# Altium PCB pci_104.PcbDoc (part 3 of 4)
Units mil, origin at the board's own origin, x right, y up, seen from the top; angles counter-clockwise.
Board outline 3775.2 x 3550 mil, 4 copper layers (Top Layer - RF, MidLayer2 - GND, MidLayer3 - POWER, Bottom Layer - Digital), stack 61.756 mil thick; 251 components, 242 nets, 872 pads, 382 vias.
Unrouted connection lines stored in the file: 291.
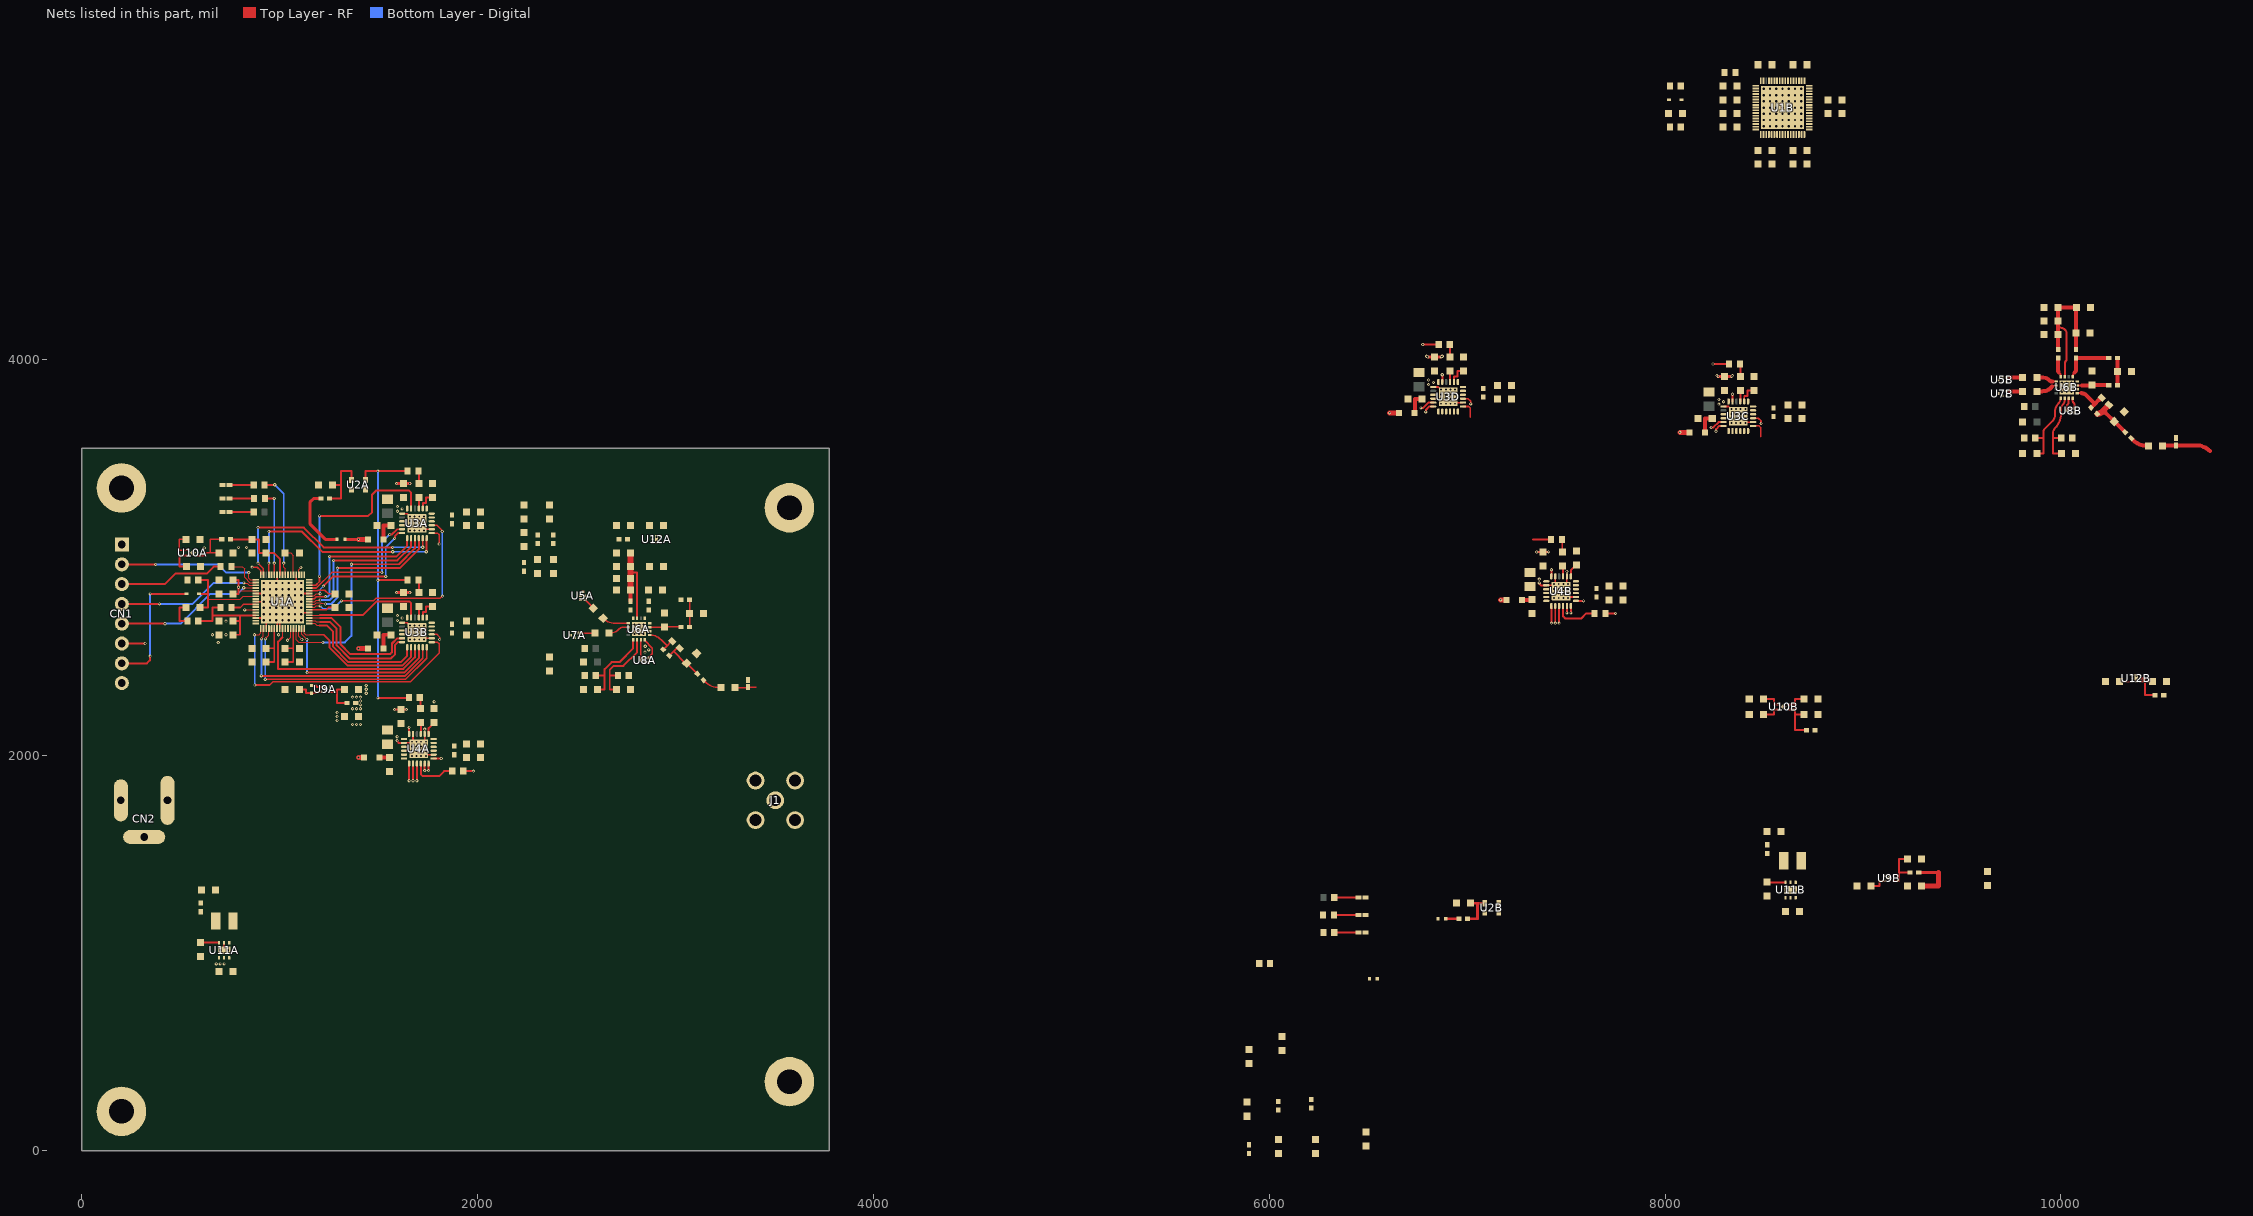
[diagram p4: the nets of this part, all layers, seen from the top]

## Via types
v1: diameter 15.75, hole 7.87, Top Layer - RF to Bottom Layer - Digital, tented both sides, 154 vias
v2: diameter 19.68, hole 9.84, Top Layer - RF to Bottom Layer - Digital, tented top, 114 vias
v3: diameter 23.62, hole 11.81, Top Layer - RF to Bottom Layer - Digital, tented top, 102 vias
v4: diameter 15.75, hole 7.87, Top Layer - RF to Bottom Layer - Digital, 8 vias
v5: diameter 15.75, hole 7.87, Top Layer - RF to Bottom Layer - Digital, tented top, 4 vias

## Nets (pads, with @x,y where several pads share a name; then routed paths per layer and width w, separated by ;. In a path a pad name is that pad's centre, name@x,y a point inside that pad or via, vN(x,y) a via of type N, cw(c..) or ccw(c..) an arc to the next point about the centre after c; other vN are vias at no path point) (continued)
GND: C1A.1 C1B.1 C2A.1 C2B.1 C3A.1 C3B.1 C4A.1 C4B.1 C6A.1 C6B.1 C7A.1 C7B.1 C8A.1 C8B.1 C9A.1 C9B.1 C10A.1 C10B.1 C11A.1 C11B.1 C12A.1 C12B.1 C13A.1 C13B.1 C14A.2 C14B.2 C15A.2 C15B.2 C16A.2 C16B.2 C18A.1 C18B.1 C19A.2 C19B.2 C23A.2 C23B.2 C23C.2 C23D.2 C24A.2 C24B.2 C24C.2 C24D.2 C25A.2 C25B.2 C25C.2 C25D.2 C26A.2 C26B.2 C26C.2 C26D.2 C29A.2 C29B.2 C30A.2 C30B.2 C31A.2 C31B.2 C32A.2 C32B.2 C33A.2 C33B.2 C34A.2 C34B.2 C35A.2 C35B.2 C36A.2 C36B.2 C37A.2 C37B.2 C38A.2 C38B.2 C39A.2 C39B.2 C44A.2 C44B.2 C45A.2 C45B.2 C46A.2 C46B.2 C47A.2 C47B.2 C48A.2 C48B.2 C49A.2 C49B.2 C50A.2 C50B.2 C51A.2 C51B.2 C52A.2 C52B.2 C53A.1 C53B.1 C54A.1 C54B.1 C55A.2 C55B.2 C56A.2 C56B.2 C57A.2 C57B.2 C58A.2 C58B.2 C59A.2 C59B.2 C60A.2 C60B.2 CN1.1 CN2.2 CN2.3 D2A.2 D2B.2 D3A.2 D3B.2 D4A.2 D4B.2 D5A.2 D5B.2 J1.2 pad. R3A.1 R3B.1 U1A.6 U1A.9 U1A.15 U1A.20 U1A.24 U1A.25 U1A.39 U1A.46 U1A.55 U1A.62 U1A.69 U1B.6 U1B.9 U1B.15 U1B.20 U1B.24 U1B.25 U1B.39 U1B.46 U1B.55 U1B.62 U1B.69 U2A.1 U2A.2 U2B.1 U2B.2 U3A.7 U3A.20 U3A.25 U3B.7 U3B.20 U3B.25 U3C.7 U3C.20 U3C.25 U3D.7 U3D.20 U3D.25 U4A.2 U4A.5 U4A.8 U4A.20 U4A.25 U4B.2 U4B.5 U4B.8 U4B.20 U4B.25 U5A.2 U5A.3 U5A.5 U5B.2 U5B.3 U5B.5 U6A.10 U6A.12 U6A.17 U6B.10 U6B.12 U6B.17 U7A.2 U7A.3 U7A.5 U7B.2 U7B.3 U7B.5 U8A.2 U8A.3 U8A.5 U8B.2 U8B.3 U8B.5 U9A.2 U9A.5 U9B.2 U9B.5 U10A.2 U10A.5 U10B.2 U10B.5 U11A.2 U11A.6 U11A.7 U11B.2 U11B.6 U11B.7 U12A.3 U12A.7 U12B.3 U12B.7 | length 1830
  Top Layer - RF w6: U1A.69@931.1,2692.91 v3(950.79,2712.6) v3(982.28,2744.09) v3(1013.78,2775.59)
  Top Layer - RF w8: U1A.15@877.95,2692.91 908.53,2692.91 919.29,2682.15 v3(919.29,2681.1) 920.34,2681.1 931.1,2670.34 U1A.20@931.1,2639.76 ; U1A.9@877.95,2775.59 v3(919.29,2775.59) ; U1A.6@877.95,2816.93 909.45,2816.93 v3(919.29,2807.09) ; v3(982.28,2681.1) 986.22,2677.17 U1A.24@986.22,2639.76 ; v3(982.28,2870.08) 986.22,2874.02 U1A.62@986.22,2911.42 ; U1A.25@1000,2639.76 1000,2670.34 1010.76,2681.1 v3(1013.78,2681.1) ; v3(1076.77,2870.08) 1082.68,2875.98 U1A.55@1082.68,2911.42 ; v3(1108.27,2712.6) 1116.14,2720.47 U1A.39@1149.61,2720.47 ; v3(1108.27,2807.09) 1118.11,2816.93 U1A.46@1149.61,2816.93 ; U3B.7@1618.11,2669.29 1643.7,2669.29 v2(1657.48,2655.51) ; U3A.7@1618.11,3220.47 1643.7,3220.47 v2(1657.48,3206.69) ; U4A.8@1627.95,2061.69 1661.42,2061.69 v2(1667.32,2067.6) 1673.23,2067.6 U4A.5@1673.23,2106.97 ; v2(1728.35,2584.65) 1734.25,2590.55 U3B.20@1767.72,2590.55 ; v2(1728.35,3135.83) 1734.25,3141.73 U3A.20@1767.72,3141.73 ; U4A.2@1732.28,2106.97 1732.28,2067.6 v2(1738.19,2067.6) ; v2(1738.19,1996.73) 1738.19,2002.63 U4A.20@1777.56,2002.63 ; U3D.7@6828.74,3860.24 6854.33,3860.24 v2(6868.11,3846.46) ; v2(6938.98,3775.59) 6944.88,3781.5 U3D.20@6978.35,3781.5 ; U4B.8@7399.61,2858.27 7433.07,2858.27 v2(7438.98,2864.17) 7444.88,2864.17 U4B.5@7444.88,2903.54 ; U4B.2@7503.94,2903.54 7503.94,2864.17 v2(7509.84,2864.17) ; v2(7509.84,2793.31) 7509.84,2799.21 U4B.20@7549.21,2799.21 ; U3C.7@8295.28,3761.81 8320.87,3761.81 v2(8334.65,3748.03) ; v2(8405.51,3677.17) 8411.42,3683.07 U3C.20@8444.88,3683.07
  Top Layer - RF w10: U11A.7@718.5,1013.78 U11A.2@718.5,1052.17 ; v1(1580,2230) v1(1580,2230) 1639.73,2230.04 v1(1639.76,2230.08) ; v1(1592.52,2073.5) 1593.62,2072.4 1593.62,2069.1 1601.03,2061.69 U4A.8@1627.95,2061.69 ; v1(7364.17,2870.08) 7365.27,2868.98 7365.27,2865.68 7372.69,2858.27 U4B.8@7399.61,2858.27 ; U10B.2@8620.08,2256.89 8657.48,2256.89 8657.48,2283.46 C53B.1@8700.79,2283.46
  Top Layer - RF w15: v1(1590.42,2820.96) 1590.42,2821.4 v1(1657.79,2821.4) ; v1(1590.42,3372.14) 1590.42,3372.58 v1(1657.79,3372.58) ; v1(6801.05,4011.91) 6801.05,4012.35 v1(6868.42,4012.35) ; v1(8267.58,3913.48) 8267.58,3913.92 v1(8334.95,3913.92)
  other v1: 1592.52,2093.19 1732.3,2131.44 1289.37,2175.2 1289.37,2194.88 1289.37,2214.57 1780,2270 1437.01,2312.99 1437.01,2332.68 1437.01,2352.36 2845.47,2520.67 2864.17,2531.5 2846.46,2550.2 688.98,2568.9 659.45,2608.27 728.35,2608.27 994.09,2608.27 728.35,2677.17 1594.49,2681.1 1618.11,2692.91 1594.49,2704.72 7364.17,2889.76 7503.95,2928.01 561.02,3021.65 791.5,3049.37 832.52,3049.37 1594.49,3232.28 1618.11,3244.09 1594.49,3255.91 8271.65,3773.62 8295.28,3785.43 8271.65,3797.24 6805.12,3872.05 6828.74,3883.86 6805.12,3895.67 8261.81,3917.32 8340.55,3917.32 6795.28,4015.75 6874.02,4015.75
  other v2: 1667.32,1996.73 1690.94,1996.73 1714.57,1996.73 1667.32,2020.35 1690.94,2020.35 1714.57,2020.35 1738.19,2020.35 1667.32,2043.97 1690.94,2043.97 1714.57,2043.97 1738.19,2043.97 1690.94,2067.6 1714.57,2067.6 1657.48,2584.65 1681.1,2584.65 1704.72,2584.65 1657.48,2608.27 1681.1,2608.27 1704.72,2608.27 1728.35,2608.27 2791.34,2612.99 2814.96,2612.99 2838.58,2612.99 1657.48,2631.89 1681.1,2631.89 1704.72,2631.89 1728.35,2631.89 2791.34,2636.61 2814.96,2636.61 2838.58,2636.61 1681.1,2655.51 1704.72,2655.51 1728.35,2655.51 2791.34,2660.23 2814.96,2660.23 2838.58,2660.23 7438.98,2793.31 7462.6,2793.31 7486.22,2793.31 7438.98,2816.93 7462.6,2816.93 7486.22,2816.93 7509.84,2816.93 7438.98,2840.55 7462.6,2840.55 7486.22,2840.55 7509.84,2840.55 7462.6,2864.17 7486.22,2864.17 1657.48,3135.83 1681.1,3135.83 1704.72,3135.83 1657.48,3159.45 1681.1,3159.45 1704.72,3159.45 1728.35,3159.45 1657.48,3183.07 1681.1,3183.07 1704.72,3183.07 1728.35,3183.07 1681.1,3206.69 1704.72,3206.69 1728.35,3206.69 8334.65,3677.17 8358.27,3677.17 8381.89,3677.17 8334.65,3700.79 8358.27,3700.79 8381.89,3700.79 8405.51,3700.79 8334.65,3724.41 8358.27,3724.41 8381.89,3724.41 8405.51,3724.41 8358.27,3748.03 8381.89,3748.03 8405.51,3748.03 6868.11,3775.59 6891.73,3775.59 6915.35,3775.59 6868.11,3799.21 6891.73,3799.21 6915.35,3799.21 6938.98,3799.21 6868.11,3822.83 6891.73,3822.83 6915.35,3822.83 6938.98,3822.83 10005.91,3834.65 10029.53,3834.65 10053.15,3834.65 6891.73,3846.46 6915.35,3846.46 6938.98,3846.46 10005.91,3858.27 10029.53,3858.27 10053.15,3858.27 10005.91,3881.89 10029.53,3881.89 10053.15,3881.89
  other v3: 698.82,1013.78 738.19,1013.78 8614.17,1318.9 8653.54,1318.9 950.79,2681.1 1045.28,2681.1 1076.77,2681.1 1108.27,2681.1 919.29,2712.6 982.28,2712.6 1013.78,2712.6 1045.28,2712.6 1076.77,2712.6 919.29,2744.09 950.79,2744.09 1013.78,2744.09 1045.28,2744.09 1076.77,2744.09 1108.27,2744.09 950.79,2775.59 982.28,2775.59 1045.28,2775.59 1076.77,2775.59 1108.27,2775.59 950.79,2807.09 982.28,2807.09 1013.78,2807.09 1045.28,2807.09 1076.77,2807.09 919.29,2838.58 950.79,2838.58 982.28,2838.58 1013.78,2838.58 1045.28,2838.58 1076.77,2838.58 1108.27,2838.58 919.29,2870.08 950.79,2870.08 1013.78,2870.08 1045.28,2870.08 1108.27,2870.08 8498.91,5177.47 8530.41,5177.47 8561.91,5177.47 8593.4,5177.47 8624.9,5177.47 8656.39,5177.47 8687.89,5177.47 8498.91,5208.97 8530.41,5208.97 8561.91,5208.97 8593.4,5208.97 8624.9,5208.97 8656.39,5208.97 8687.89,5208.97 8498.91,5240.46 8530.41,5240.46 8561.91,5240.46 8593.4,5240.46 8624.9,5240.46 8656.39,5240.46 8687.89,5240.46 8498.91,5271.96 8530.41,5271.96 8561.91,5271.96 8593.4,5271.96 8624.9,5271.96 8656.39,5271.96 8687.89,5271.96 8498.91,5303.46 8530.41,5303.46 8561.91,5303.46 8593.4,5303.46 8624.9,5303.46 8656.39,5303.46 8687.89,5303.46 8498.91,5334.95 8530.41,5334.95 8561.91,5334.95 8593.4,5334.95 8624.9,5334.95 8656.39,5334.95 8687.89,5334.95 8498.91,5366.45 8530.41,5366.45 8561.91,5366.45 8593.4,5366.45 8624.9,5366.45 8656.39,5366.45 8687.89,5366.45
  other v4: 618.11,3047.24
  other v5: 10380.51,2375.98 10380.51,2399.61 2903.54,3078.74 2903.54,3102.36
GPIO1: CN1.7 D1A.2 | length 669.1
  Top Layer - RF w10: CN1.7@201.85,2464.06 328.23,2464.06 343.39,2479.22 343.39,2498.9 v4(344.49,2500) ; v4(344.49,2814.96) D1A.2@529.52,2814.96
  Bottom Layer - Digital w10: v4(344.49,2500) v4(344.49,2814.96)
GPIO1A: U1A.64
GPIO1B: U1B.64
GPIO2: CN1.8 D1B.2
GPIO3A: U1A.60
GPIO3B: U1B.60
GPIO5A: U1A.58
GPIO5B: U1B.58
GPIO6A: U1A.57
GPIO6B: U1B.57
GPIO8A: U1A.53
GPIO8B: U1B.53
GPIO9A: U1A.52
GPIO9B: U1B.52
GPIO10A: U1A.51
GPIO10B: U1B.51
GPIO11A: U1A.50
GPIO11B: U1B.50
HOST_CSNA: CN1.5 U1A.4 U1B.4 | length 751
  Top Layer - RF w6: v1(817.91,2845.58) 818.46,2845.04 U1A.4@877.41,2845.04
  Top Layer - RF w10: CN1.5@201.85,2664.06 v4(419.96,2664.06)
  Bottom Layer - Digital w10: v4(419.96,2664.06) 498.7,2664.06 649.61,2814.96 787.29,2814.96 v1(817.91,2845.58)
HOST_MISOA: CN1.3 R1A.2 R1B.2 R12A.1 R12B.1 | length 638
  Top Layer - RF w10: CN1.3@201.85,2864.06 419.17,2864.06 472.44,2917.32 629.92,2917.32 665.35,2952.76 R1A.2@700.79,2952.76 ; R12A.1@1927.17,1919.29 v1(1978.35,1919.29) ; R12B.1@7698.82,2715.87 v1(7750,2715.87)
HOST_MOSIA: CN1.4 U1A.3 U1B.3 U4A.17 U4B.17 | length 795.8
  Top Layer - RF w6: v1(818.9,2870.08) 819.55,2869.43 835.77,2869.43 846.93,2858.27 U1A.3@877.95,2858.27
  Top Layer - RF w10: CN1.4@201.85,2764.06 v4(392.01,2764.06) ; v1(1732.28,1921.93) U4A.17@1732.28,1957.36 ; v1(7503.94,2718.5) U4B.17@7503.94,2753.94
  Bottom Layer - Digital w10: v4(392.01,2764.06) 559.33,2764.06 665.35,2870.08 v1(818.9,2870.08)
HOST_SCKA: CN1.2 U1A.1 U1B.1 U4A.18 U4B.18 | length 796.7
  Top Layer - RF w6: v1(842.91,2922.31) 842.52,2921.91 842.52,2893.7 850.39,2885.83 U1A.1@877.95,2885.83
  Top Layer - RF w10: CN1.2@201.85,2964.06 v4(372.56,2964.06) ; v1(1752.03,1921.93) U4A.18@1752,1957.33 ; v1(7523.68,2718.5) U4B.18@7523.62,2753.94
  Bottom Layer - Digital w10: v4(372.56,2964.06) 687.52,2964.06 729.27,2922.31 v1(842.91,2922.31)
NetC5A_2: C5A.2 R2A.1 | length 143.7
  Top Layer - RF w10: C5A.2@525.59,2746.06 492.13,2746.06 492.13,2677.17 R2A.1@533.46,2677.17
NetC5B_2: C5B.2 R2B.1
NetC14A_1: C14A.1 F1A.2 U2A.4 | length 336.5
  Top Layer - RF w10: F1A.2@1252.08,3297.24 1309.06,3297.24 1309.06,3366.14 ; C14A.1@1265.75,3366.14 1309.06,3366.14 ; U2A.4@1362.2,3389.76 1362.2,3435.04 1309.06,3435.04 1309.06,3366.14
NetC14B_1: C14B.1 F1B.2 U2B.4 | length 201.7
  Top Layer - RF w13: F1B.2@7002.08,1173.23 7052.17,1173.23 7052.17,1251.97 ; C14B.1@7015.75,1251.97 7052.17,1251.97 ; U2B.4@7088.58,1251.97 7052.17,1251.97
NetC17A_1: C17A.1 C18A.2 L2A.2
NetC17A_2: C17A.2 L3A.1
NetC17B_1: C17B.1 C18B.2 L2B.2
NetC17B_2: C17B.2 L3B.1
NetC20A_1: C20A.1 C28A.2
NetC20B_1: C20B.1 C28B.2
NetC21A_1: C21A.1 U3A.3 | length 55.1
  Top Layer - RF w10: U3A.3@1702.76,3246.06 C21A.1@1702.76,3301.18
NetC21A_2: C21A.2 R10A.2 | length 65
  Top Layer - RF w10: R10A.2@1700.79,3435.04 1702.76,3435.04 C21A.2@1702.76,3372.05
NetC21B_1: C21B.1 U3B.3 | length 55.1
  Top Layer - RF w10: U3B.3@1702.76,2694.88 C21B.1@1702.76,2750
NetC21B_2: C21B.2 R10B.2 | length 65
  Top Layer - RF w10: R10B.2@1700.79,2883.86 1702.76,2883.86 C21B.2@1702.76,2820.87
NetC21C_1: C21C.1 U3C.3 | length 55.1
  Top Layer - RF w10: U3C.3@8379.92,3787.4 C21C.1@8379.92,3842.52
NetC21C_2: C21C.2 R10C.2 | length 65
  Top Layer - RF w10: R10C.2@8377.95,3976.38 8379.92,3976.38 C21C.2@8379.92,3913.39
NetC21D_1: C21D.1 U3D.3 | length 55.1
  Top Layer - RF w10: U3D.3@6913.39,3885.83 C21D.1@6913.39,3940.95
NetC21D_2: C21D.2 R10D.2 | length 65
  Top Layer - RF w10: R10D.2@6911.42,4074.8 6913.39,4074.8 C21D.2@6913.39,4011.81
NetC27A_1: C27A.1 U4A.3 | length 58.7
  Top Layer - RF w10: C27A.1@1710,2164.57 1712.6,2161.97 U4A.3@1712.6,2106.97
NetC27A_2: C27A.2 R11A.2 | length 55.6
  Top Layer - RF w10: R11A.2@1707.56,2290 1710,2287.56 C27A.2@1710,2235.43
NetC27B_1: C27B.1 U4B.3 | length 54.8
  Top Layer - RF w10: C27B.1@7480.31,2956.69 7484.25,2952.76 U4B.3@7484.25,2903.54
NetC27B_2: C27B.2 R11B.2 | length 123.6
  Top Layer - RF w10: v1(7351.65,3026.58) v1(7351.65,3026.58) 7411.38,3026.62 v1(7411.42,3026.65) ; R11B.2@7478.35,3090.55 7480.31,3088.58 C27B.2@7480.31,3027.56
NetC31A_1: C31A.1 L7A.1 U4A.7
NetC31B_1: C31B.1 L7B.1 U4B.7
NetC38A_1: C38A.1 L9A.2 L10A.1 | length 137.8
  Top Layer - RF w7.57: L10A.1@3070.87,2647.64 C38A.1@3070.87,2716.54 L9A.2@3070.87,2785.43
NetC38B_1: C38B.1 L9B.2 L10B.1 | length 137.8
  Top Layer - RF w20: L10B.1@10285.43,3869.3 C38B.1@10285.43,3938.19 L9B.2@10285.43,4007.09
NetC39A_1: C39A.1 L10A.2 U6A.11 | length 158.6
  Top Layer - RF w7.57: U6A.11@2869.09,2646.45 2940.05,2646.45 ccw(c2940.05,2650.5) C39A.1@2942.91,2647.64 L10A.2@3027.34,2647.64
NetC39B_1: C39B.1 L10B.2 U6B.11 | length 158.6
  Top Layer - RF w10: U6B.11@10083.66,3868.11 10107.28,3868.11
  Top Layer - RF w20: 10107.28,3868.11 10154.62,3868.11 ccw(c10154.62,3872.16) C39B.1@10157.48,3869.3 L10B.2@10241.91,3869.3
NetC40A_1: C40A.1 U5A.4 | length 60.2
  Top Layer - RF w7.57: U5A.4@2542.89,2785.43 C40A.1@2580.72,2747.61 ; C40A.1@2580.73,2747.6 cw(c2574.71,2741.59) C40A.1@2583.21,2741.59
NetC40A_2: C40A.2 U6A.1 | length 134.3
  Top Layer - RF w7.57: C40A.2@2633.32,2691.48 ccw(c2694.51,2752.66) 2694.51,2666.14 U6A.1@2760.83,2666.14
NetC40B_1: C40B.1 U5B.4 | length 82.8
  Top Layer - RF w10: U5B.4@9724.41,3907.48 9743.89,3907.48 9744.09,3907.68
  Top Layer - RF w20: 9744.09,3907.68 9806.89,3907.68 C40B.1@9807.09,3907.48
NetC40B_2: C40B.2 U6B.1 | length 102.7
  Top Layer - RF w10: 9956.67,3887.8 U6B.1@9975.39,3887.8
  Top Layer - RF w20: C40B.2@9877.95,3907.48 9909.15,3907.48 cw(c9909.15,3861.12) 9941.93,3893.9 ccw(c9956.67,3908.64) 9956.67,3887.8
NetC41A_2: C41A.2 L12A.2 | length 98.8
  Top Layer - RF w7.57: L12A.2@3141.01,2379.45 3149.84,2370.62 ccw(c3220.56,2441.33) 3220.56,2341.33 C41A.2@3228.35,2341.33
NetC41B_2: C41B.2 L12B.2 | length 98.8
  Top Layer - RF w20: L12B.2@10355.58,3601.11 10364.41,3592.28 ccw(c10435.12,3662.99) 10435.12,3562.99 C41B.2@10442.91,3562.99
NetC42A_1: C42A.1 L13A.1 U6A.9 | length 169.9
  Top Layer - RF w7.57: U6A.9@2869.09,2607.08 cw(c2869.09,2524.95) 2927.17,2583.03 2956.84,2553.36 ; L13A.1@2937.37,2533.89 2956.84,2553.36 ; C42A.1@2983.87,2575.97 ccw(c2983.87,2565.27) 2976.32,2572.84 2956.84,2553.36
NetC42A_2: C42A.2 C44A.1 L12A.1 L13A.2 | length 229.7
  Top Layer - RF w7.57: L13A.2@2968.15,2503.11 2989.53,2524.5 ; C42A.2@3011.61,2547.55 cw(c3009.25,2547.55) 3010.92,2545.89 2989.53,2524.5 ; L12A.1@3110.24,2410.23 cw(c3110.24,2412.4) 3108.71,2410.86 C44A.1@3055.65,2463.92 cw(c3055.65,2477.3) 3046.2,2467.83 2989.53,2524.5
NetC42B_1: C42B.1 L13B.1 U6B.9 | length 172.1
  Top Layer - RF w10: U6B.9@10083.66,3828.74 10104.5,3828.74
  Top Layer - RF w20: 10104.5,3828.74 cw(c10104.5,3796.91) 10127.01,3819.42 10171.41,3775.02 ; L13B.1@10151.93,3755.55 10171.41,3775.02 ; 10190.88,3794.49 10171.41,3775.02 ; 10190.89,3794.5 cw(c10198.44,3786.93) C42B.1@10198.44,3797.62
NetC42B_2: C42B.2 C44B.1 L12B.1 L13B.2 | length 223.2
  Top Layer - RF w20: L13B.2@10182.71,3724.77 ccw(c10182.71,3761.6) L13B.2@10183.86,3724.79 ; 10208.75,3735.55 cw(c10208.75,3707.82) 10228.36,3727.43 C44B.1@10270.22,3685.58 L12B.1@10323.27,3632.52 ; L12B.1@10323.28,3632.52 ccw(c10324.8,3634.06) L12B.1@10324.8,3631.89
  Top Layer - RF w30: L13B.2@10183.86,3724.79 ccw(c10182.71,3761.6) 10208.75,3735.55 C42B.2@10234.63,3761.43
NetC43A_1: C43A.1 U7A.4 | length 82.7
  Top Layer - RF w7.57: U7A.4@2509.84,2616.93 C43A.1@2592.52,2616.93
NetC43A_2: C43A.2 U6A.2 | length 105.3
  Top Layer - RF w7.57: C43A.2@2663.39,2616.93 2666.15,2616.93 ccw(c2666.15,2688.18) 2716.54,2637.8 cw(c2737.44,2616.89) 2737.44,2646.45 U6A.2@2760.83,2646.45
NetC43B_1: C43B.1 U7B.4 | length 82.6
  Top Layer - RF w10: U7B.4@9724.61,3838.78 9742.13,3838.78
  Top Layer - RF w20: 9742.13,3838.78 9742.33,3838.58 C43B.1@9807.09,3838.58
NetC43B_2: C43B.2 U6B.2 | length 107.7
  Top Layer - RF w10: 9954.16,3861.58 9955.76,3859.98 cw(c9975.39,3840.34) 9971.54,3867.84 U6B.2@9975.39,3868.11
  Top Layer - RF w20: C43B.2@9877.95,3838.58 9903.96,3838.58 ccw(c9904.11,3911.63) 9945.55,3851.48 ccw(c9934.2,3867.94) 9950.63,3856.54 9954.16,3861.58
NetC49A_1: C49A.1 F2A.1 U9A.1 | length 194.8
  Top Layer - RF w10: U9A.1@1251.97,2319.88 1289.37,2319.88 ; C49A.1@1326.77,2332.68 1289.37,2332.68 1289.37,2319.88 ; F2A.1@1340.44,2263.78 1289.37,2263.78 1289.37,2319.88
NetC49B_1: C49B.1 F2B.1 U9B.1 | length 239.1
  Top Layer - RF w10: U9B.1@9153.54,1365.16 9181.1,1365.16 9181.1,1407.48 ; C49B.1@9224.41,1476.38 9181.1,1476.38 9181.1,1407.48 ; F2B.1@9238.08,1407.48 9181.1,1407.48
NetC52A_1: C52A.1 F3A.1 U10A.1 | length 241.4
  Top Layer - RF w8: U10A.1@582.68,3008.86 617.13,3008.86 620.08,3011.81 629.92,3021.65 649.61,3021.65 ; C52A.1@692.91,3021.65 649.61,3021.65 ; F3A.1@706.58,3090.55 649.61,3090.55 649.61,3021.65
NetC52B_1: C52B.1 F3B.1 U10B.1 | length 243
  Top Layer - RF w10: U10B.1@8620.08,2231.3 8657.48,2231.3 8657.48,2204.72 ; C52B.1@8700.79,2204.72 8657.48,2204.72 ; F3B.1@8714.46,2125.98 8657.48,2125.98 8657.48,2204.72
NetC57A_1: C57A.1 F5A.1 U12A.1 U12A.2
NetC57B_1: C57B.1 F5B.1 U12B.1 U12B.2 | length 221.9
  Top Layer - RF w10: U12B.1@10400.79,2372.05 10425.2,2372.05 ; U12B.2@10400.79,2387.8 10425.2,2387.8 10425.2,2372.05 ; C57B.1@10462.6,2372.05 10425.2,2372.05 ; F5B.1@10476.27,2303.15 10425.2,2303.15 10425.2,2372.05
NetD2A_1: D2A.1 R4A.1 | length 121.3
  Top Layer - RF w10: D2A.1@746.85,3228.35 R4A.1@868.11,3228.35
NetD2B_1: D2B.1 R4B.1 | length 121.3
  Top Layer - RF w10: R4B.1@6328.74,1281.5 D2B.1@6450,1281.5
NetD3A_1: D3A.1 R5A.1 | length 123.2
  Top Layer - RF w10: D3A.1@746.85,3297.24 R5A.1@870.08,3297.24
NetD3B_1: D3B.1 R5B.1 | length 123.2
  Top Layer - RF w10: R5B.1@6326.77,1192.91 D3B.1@6450,1192.91
NetD4A_1: D4A.1 R6A.1 | length 121.3
  Top Layer - RF w10: D4A.1@746.85,3366.14 R6A.1@868.11,3366.14
NetD4B_1: D4B.1 R6B.1 | length 121.3
  Top Layer - RF w10: R6B.1@6328.74,1104.33 D4B.1@6450,1104.33
NetF1A_1: F1A.1 NT13A.1 | length 343.8
  Top Layer - RF w15: F1A.1@1208.55,3297.24 1171.26,3297.24 1151.57,3277.56 1151.57,3169.29 1230.31,3090.55 NT13A.1@1289.37,3090.55
NetF1B_1: F1B.1 NT13B.1 | length 66.8
  Top Layer - RF w13: NT13B.1@6891.73,1173.23 F1B.1@6958.55,1173.23
NetJ1_1: C41A.1 C41B.1 D5A.1 D5B.1 J1.1 | length 358.5
  Top Layer - RF w7.57: C41A.1@3299.21,2341.33 3360.42,2341.33 ccw(c3360.42,2349.43) D5A.1@3366.14,2343.7 3408.18,2343.7
  Top Layer - RF w20: C41B.1@10513.78,3562.99 cw(c10519.5,3557.27) 10519.5,3565.36 D5B.1@10580.71,3565.36 10682.59,3565.36 cw(c10682.59,3465.36) 10753.3,3536.07 10753.94,3535.43
NetL7A_2: L7A.2 U4A.9
NetL7B_2: L7B.2 U4B.9
NetL8A_2: L8A.2 L9A.1 U6A.13
NetL8B_2: L8B.2 L9B.1 U6B.13 | length 264.8
  Top Layer - RF w10: U6B.13@10059.06,3912.4 cw(c10083.3,3912.4) 10066.16,3929.55 10068.9,3932.29
  Top Layer - RF w20: 10068.9,3932.29 ccw(c10049.89,3951.3) 10076.77,3951.3 L8B.2@10076.77,4006.87 10241.68,4006.87 L9B.1@10241.91,4007.09
NetL11A_2: L11A.2 U6A.16
NetL11B_2: L11B.2 U6B.16 | length 98.6
  Top Layer - RF w10: 9989.17,3934.26 9992.2,3931.23 cw(c9973.38,3912.4) U6B.16@10000,3912.4
  Top Layer - RF w20: L11B.2@9986.22,4006.87 9986.22,3941.38 ccw(c9996.3,3941.38) 9989.17,3934.26
NetL14A_1: L14A.1 U11A.1
NetL14B_1: L14B.1 U11B.1
NetNT15A_2: NT15A.2 U9A.3 | length 51.8
  Top Layer - RF w10: NT15A.2@1159.68,2352.36 1181.1,2352.36 1187.99,2345.47 U9A.3@1208.66,2345.47
NetNT15B_2: NT15B.2 U9B.3
NetR1A_1: R1A.1 U1A.2 | length 180.8
  Top Layer - RF w6: R1A.1@755.91,2952.76 811.02,2952.76 822.83,2940.94 822.83,2897.66 848.45,2872.05 U1A.2@877.95,2872.05
NetR1B_1: R1B.1 U1B.2
NetR12A_2: R12A.2 U4A.16 | length 227
  Top Layer - RF w10: U4A.16@1712.6,1957.36 1712.6,1904.21 1722.44,1894.37 1805.78,1894.37 1830.71,1919.29 R12A.2@1872.05,1919.29
NetR12B_2: R12B.2 U4B.16 | length 227
  Top Layer - RF w10: U4B.16@7484.25,2753.94 7484.25,2700.79 7494.09,2690.94 7577.44,2690.94 7602.36,2715.87 R12B.2@7643.7,2715.87
NetU6A_7: U6A.7 U8A.1 | length 102.2
  Top Layer - RF w7.57: U8A.1@2824.8,2480.32 U6A.7@2824.8,2582.48
NetU6A_8: U6A.8 U8A.4 | length 114.5
  Top Layer - RF w7.57: U6A.8@2844.49,2582.48 2844.49,2579.52 2882.87,2541.14 2882.87,2511.81 2864.17,2493.11 U8A.4@2864.17,2491.63
NetU6B_7: U6B.7 U8B.1 | length 66.6
  Top Layer - RF w10: U8B.1@10029.53,3740.16 10029.53,3760.96 cw(c10046.33,3760.96) 10034.45,3772.84 ccw(c10022.57,3784.72) 10039.37,3784.72 U6B.7@10039.37,3804.13
NetU6B_8: U6B.8 U8B.4 | length 55.3
  Top Layer - RF w10: U6B.8@10059.06,3804.13 10059.06,3792.59 ccw(c10075.86,3792.59) 10063.98,3780.71 cw(c10052.1,3768.83) 10068.9,3768.83 U8B.4@10068.9,3751.48
PA_ONA: C47A.1 R15A.1 U6A.5 | length 415.1
  Top Layer - RF w10: R15A.1@2596.46,2401.57 2641.73,2401.57 ; C47A.1@2604.33,2332.68 2641.73,2332.68 2641.73,2401.57 ; U6A.5@2785.43,2582.48 2785.43,2539.37 2716.54,2470.47 2677.17,2470.47 2641.73,2435.04 2641.73,2401.57
PA_ONB: C47B.1 R15B.1 U6B.5 | length 383.7
  Top Layer - RF w10: R15B.1@9870.08,3603.55 9911.42,3603.55 ; C47B.1@9877.95,3524.81 9911.42,3524.81 9911.42,3603.55 ; U6B.5@10000,3804.13 cw(c9967.22,3804.13) 9990.4,3780.95 9990.16,3780.71 ccw(c10037.68,3733.19) 9970.47,3733.19 9970.47,3719.69 cw(c9925.32,3719.69) 9957.25,3687.76 9917.67,3648.19 ccw(c9932.8,3633.07) 9911.42,3633.07 9911.42,3603.55
PPSA: U1A.8
PPSB: U1B.8
RADIO_CTRL1A: U1A.11
RADIO_CTRL1B: U1B.11
RADIO_CTRL3A: U1A.13
RADIO_CTRL3B: U1B.13
RADIO_CTRL4A: U1A.16
RADIO_CTRL4B: U1B.16
RADIO_CTRL5A: U1A.17
RADIO_CTRL5B: U1B.17
RADIO_CTRL6A: U1A.22
RADIO_CTRL6B: U1B.22
RADIO_CTRL8A: U1A.27
RADIO_CTRL8B: U1B.27
RADIO_CTRL9A: U1A.28
RADIO_CTRL9B: U1B.28
RADIOA.RADIO_CLK_32MA: U1A.43 U3A.14 | length 778.1
  Top Layer - RF w6: U1A.43@1149.61,2775.59 1175.46,2775.59 1183.66,2783.8 v1(1203.66,2783.8)
  Top Layer - RF w10: v1(1271.65,2984.25) 1594.49,2984.25 1663.39,3053.15 U3A.14@1663.39,3096.46
  Bottom Layer - Digital w10: v1(1203.66,2783.8) 1252.3,2783.8 1271.65,2803.15 v1(1271.65,2984.25)
RADIOA.RADIO_CLK_32MB: U1B.43 U3C.14
RADIOA.RADIO_CLK_OA: U1A.48 U3A.11 | length 681
  Top Layer - RF w8: U1A.48@1149.61,2844.49 1184.79,2844.49 1263.53,2923.23 v1(1515.75,2923.23)
  Top Layer - RF w10: v1(1555,3115) 1555.34,3115.34 1567,3115.34 1593.05,3141.39 1617.76,3141.39 U3A.11@1618.11,3141.73
  Bottom Layer - Digital w10: v1(1515.75,2923.23) 1515.75,3075.75 v1(1555,3115)
RADIOA.RADIO_CLK_OB: U1B.48 U3C.11 | length 74.2
  Top Layer - RF w10: v1(8232.17,3656.34) 8232.51,3656.68 8244.17,3656.68 8270.21,3682.72 8294.93,3682.72 U3C.11@8295.28,3683.07
RADIOA.RADIO_IQ(0)A: U1A.44 U3A.13 | length 757
  Top Layer - RF w8: U1A.44@1149.61,2789.37 1173.68,2789.37 1183.98,2799.67 1203.66,2799.67 cw(c1203.66,2783.8) 1204.18,2799.66 1210.8,2799.66 v1(1230.31,2800.67)
  Top Layer - RF w10: v1(1251.97,3003.94) 1590.55,3003.94 1643.7,3057.09 U3A.13@1643.7,3096.46
  Bottom Layer - Digital w10: v1(1230.31,2800.67) 1230.84,2801.19 1242.14,2801.19 1251.97,2811.02 v1(1251.97,3003.94)
RADIOA.RADIO_IQ(0)B: U1B.44 U3C.13
RADIOA.RADIO_IQ(1)A: U1A.45 U3A.12 | length 703.2
  Top Layer - RF w6: U1A.45@1151.13,2804.68 1173.43,2804.68 1184.3,2815.54 v1(1203.66,2815.54)
  Top Layer - RF w10: v1(1220.47,2854.33) 1269.68,2903.54 v1(1535.43,2903.54) ; v1(1580,3095) 1581.1,3096.1 1581.1,3106.1 1597.05,3122.05 U3A.12@1618.11,3122.05
  Bottom Layer - Digital w6: v1(1203.66,2815.54) 1203.66,2837.52 v1(1220.47,2854.33)
  Bottom Layer - Digital w10: v1(1535.43,2903.54) 1535.43,3050.43 v1(1580,3095)
RADIOA.RADIO_IQ(1)B: U1B.45 U3C.12 | length 55.2
  Top Layer - RF w10: v1(8257.17,3636.34) 8258.27,3637.44 8258.27,3647.44 8274.21,3663.39 U3C.12@8295.28,3663.39
RADIOA.RADIO_IQ(2)A: U1A.49 U3A.5 | length 1042.5
  Top Layer - RF w8: U1A.49@1149.79,2858.08 1181.41,2858.08 1200.79,2877.46 v1(1200.79,2903.54)
  Top Layer - RF w10: v1(1200.79,3208.66) 1446.85,3208.66 1466.54,3228.35 1466.54,3316.93 1486.22,3336.61 1653.54,3336.61 1663.39,3326.77 1663.39,3282.48 U3A.5@1663.39,3246.06
  Bottom Layer - Digital w8: v1(1200.79,2903.54) v1(1200.79,3208.66)
RADIOA.RADIO_IQ(2)B: U1B.49 U3C.5 | length 36.4
  Top Layer - RF w10: U3C.5@8340.55,3787.4 v1(8340.55,3823.82)
RADIOA.RADIO_IQ(3)A: U1A.41 U3A.21 | length 1103.8
  Top Layer - RF w6: U1A.41@1149.61,2748.03 1177.9,2748.03 1183.66,2753.8 v1(1203.66,2753.8)
  Top Layer - RF w8: v1(1311.02,2779.53) 1473.74,2779.53 1486.54,2792.32 1809.91,2792.32 1820.74,2803.15 v1(1822.83,2803.15) ; U3A.21@1767.72,3161.42 1793.9,3161.42 1817.96,3137.36 1817.96,3134.92 1820.87,3132.02 v1(1820.87,3129.92)
  Bottom Layer - Digital w8: v1(1203.66,2753.8) 1204.49,2753.8 1218.13,2740.16 1271.65,2740.16 v1(1311.02,2779.53) ; v1(1820.87,3129.92) 1821.85,3128.94 1821.85,2804.13 v1(1822.83,2803.15)
RADIOA.RADIO_IQ(3)B: U1B.41 U3C.21 | length 57.9
  Top Layer - RF w8: U3C.21@8444.88,3702.76 8471.07,3702.76 8484.74,3689.09 v1(8484.74,3676.68)
RADIOA.SPI_CSNA: U1A.68 U3A.19 | length 158.9
  Top Layer - RF w8: v1(860,2950) 885.79,2950 903.02,2932.77 U1A.68@903.02,2911.94 ; U3A.19@1767.72,3122.05 1797.24,3122.05 1805.12,3114.17 1805.12,3067.06 v1(1804.99,3066.93)
RADIOA.SPI_CSNB: U1B.68 U3C.19 | length 87.9
  Top Layer - RF w8: U3C.19@8444.88,3663.39 8474.41,3663.39 8482.28,3655.51 8482.28,3608.27
RADIOA.SPI_MISOA: U1A.42 U3A.16 | length 817.4
  Top Layer - RF w6: U1A.42@1149.61,2761.81 1177.53,2761.81 1184.52,2768.8 1205.9,2768.8 1206.02,2768.67 1218.4,2768.67 v1(1230.31,2763.8) v1@1227.68,2763.8
  Top Layer - RF w10: v1(1291.34,2944.88) 1606.3,2944.88 1702.76,3041.34 U3A.16@1702.76,3096.46
  Bottom Layer - Digital w10: v1(1230.31,2763.8) 1259.84,2763.78 1291.34,2795.28 v1(1291.34,2944.88)
RADIOA.SPI_MISOB: U1B.42 U3C.16
RADIOA.SPI_MOSIA: U1A.67 U3A.17 | length 1169.5
  Top Layer - RF w8: v1(890,2970) 916.8,2943.2 U1A.67@916.8,2911.94 ; U3A.17@1722.44,3096.46 U3A.17@1722.44,3096.46 1722.49,3050.27 v1(1722.53,3050.22)
  Top Layer - RF w10: v1(890,3150) 1121.65,3150 1221.65,3050 v1(1570,3050)
  Bottom Layer - Digital w8: v1(1570,3050) 1570.11,3050.11 1722.42,3050.11 v1(1722.53,3050.22)
  Bottom Layer - Digital w10: v1(890,2970) v1(890,3150)
RADIOA.SPI_MOSIB: U1B.67 U3C.17 | length 0.1
  Top Layer - RF w8: U3C.17@8399.61,3637.8 U3C.17@8399.65,3637.75
RADIOA.SPI_SCKA: U1A.65 U3A.18 | length 1125.8
  Top Layer - RF w8: U1A.65@944.88,2911.42 944.88,2969.88 v1(945,2970) ; v1(1740.16,3027.43) 1741.4,3028.67 1741.4,3095.73 U3A.18@1742.13,3096.46
  Top Layer - RF w10: v1(945,3129.8) 1112.32,3129.8 1214.69,3027.43 v1(1570.99,3027.43)
  Bottom Layer - Digital w8: v1(1570.99,3027.43) v1(1740.16,3027.43)
  Bottom Layer - Digital w10: v1(945,2970) v1(945,3129.8)
RADIOA.SPI_SCKB: U1B.65 U3C.18 | length 1
  Top Layer - RF w8: U3C.18@8418.56,3637.07 U3C.18@8419.29,3637.8
RADIOA_NRESETA: U1A.31 U3A.15 | length 1123.4
  Top Layer - RF w6: U1A.31@1082.68,2639.76 1082.68,2582.68 1095.9,2569.46 v1(1217.94,2569.46)
  Top Layer - RF w10: v1(1362.2,2964.57) 1602.36,2964.57 1683.07,3045.28 U3A.15@1683.07,3096.46
  Bottom Layer - Digital w10: v1(1217.94,2569.46) 1329.3,2569.46 1362.2,2602.36 v1(1362.2,2964.57)
RADIOA_NRESETB: U1B.31 U3C.15
RADIOB.RADIO_CLK_32MA: U1A.34 U3B.14 | length 718
  Top Layer - RF w6: U1A.34@1124.02,2639.76 1124.02,2615.16 1130.91,2608.27 1152.05,2608.27
  Top Layer - RF w10: 1152.05,2608.27 1222.44,2608.27 1251.97,2578.74 1251.97,2543.31 1342.52,2452.76 1618.11,2452.76 1663.39,2498.03 U3B.14@1663.39,2545.28
RADIOB.RADIO_CLK_32MB: U1B.34 U3D.14
RADIOB.RADIO_CLK_OA: U1A.37 U3B.11 | length 652.6
  Top Layer - RF w6: U1A.37@1150.05,2693.35 1203.22,2693.35
  Top Layer - RF w10: 1203.22,2693.35 1259.4,2693.35 1307.09,2645.67 1307.09,2559.06 1354.33,2511.81 1559.06,2511.81 1567,2519.76 1567,2564.16 1593.05,2590.2 1617.76,2590.2 U3B.11@1618.11,2590.55
RADIOB.RADIO_CLK_OB: U1B.37 U3D.11 | length 74.2
  Top Layer - RF w10: v1(6765.63,3754.76) 6765.97,3755.11 6777.63,3755.11 6803.68,3781.15 6828.39,3781.15 U3D.11@6828.74,3781.5
RADIOB.RADIO_IQ(0)A: U1A.35 U3B.13 | length 676.1
  Top Layer - RF w6: U1A.35@1149.61,2665.35 1177.1,2665.35 1186.8,2655.66 1201.8,2655.66
  Top Layer - RF w10: 1201.8,2655.66 1238.04,2655.66 1267.72,2625.98 1267.72,2549.21 1346.46,2470.47 1612.2,2470.47 1643.7,2501.97 U3B.13@1643.7,2545.28
RADIOB.RADIO_IQ(0)B: U1B.35 U3D.13
RADIOB.RADIO_IQ(1)A: U1A.36 U3B.12 | length 657.6
  Top Layer - RF w6: U1A.36@1149.61,2679.13 1178.32,2679.13 1183.66,2673.8 1203.66,2673.8
  Top Layer - RF w10: 1203.66,2673.8 1251.4,2673.8 1287.4,2637.8 1287.4,2555.12 1354.33,2488.19 1561.02,2488.19 1581.1,2508.27 1581.1,2554.92 1597.05,2570.87 U3B.12@1618.11,2570.87
RADIOB.RADIO_IQ(1)B: U1B.36 U3D.12 | length 55.2
  Top Layer - RF w10: v1(6790.63,3734.76) 6791.73,3735.86 6791.73,3745.86 6807.68,3761.81 U3D.12@6828.74,3761.81
RADIOB.RADIO_IQ(2)A: U1A.38 U3B.5 | length 618.5
  Top Layer - RF w6: U1A.38@1149.61,2706.69 1204.18,2706.69
  Top Layer - RF w10: 1204.18,2707.35 1419.95,2707.35 1489.32,2776.72 1653.33,2776.72 1663.39,2766.66 U3B.5@1663.39,2694.88
RADIOB.RADIO_IQ(2)B: U1B.38 U3D.5 | length 36.4
  Top Layer - RF w10: U3D.5@6874.02,3885.83 v1(6874.02,3922.24)
RADIOB.RADIO_IQ(3)A: U1A.32 U3B.21 | length 119.8
  Top Layer - RF w6: U1A.32@1096.46,2639.76 1096.46,2600.16 1112.05,2584.57 v1(1112.05,2584.33)
  Top Layer - RF w8: U3B.21@1767.72,2610.24 1793.9,2610.24 1807.57,2596.57 v1(1807.57,2584.16)
RADIOB.RADIO_IQ(3)B: U1B.32 U3D.21 | length 57.9
  Top Layer - RF w8: U3D.21@6978.35,3801.18 7004.53,3801.18 7018.2,3787.51 v1(7018.2,3775.1)
RADIOB.SPI_CSNA: U1A.18 U3B.19 | length 1398.4
  Top Layer - RF w6: v1(872.05,2608.27) 873.11,2609.33 895.67,2609.33 903.54,2617.2 U1A.18@903.54,2639.76
  Top Layer - RF w8: v1(874.02,2354.33) 948.82,2354.33 964.57,2370.08 1659.45,2370.08 1805.12,2515.75 1805.12,2562.99 1797.24,2570.87 U3B.19@1767.72,2570.87
  Bottom Layer - Digital w8: v1(872.05,2608.27) 873.03,2607.28 873.03,2355.31 v1(874.02,2354.33)
RADIOB.SPI_CSNB: U1B.18 U3D.19 | length 87.9
  Top Layer - RF w8: U3D.19@6978.35,3761.81 7007.87,3761.81 7015.75,3753.94 7015.75,3706.69
RADIOB.SPI_MISOA: U1A.33 U3B.16 | length 884.1
  Top Layer - RF w6: U1A.33@1110.24,2639.76 1110.24,2611.23 1137.05,2584.42 v1(1137.05,2584.33)
  Top Layer - RF w10: v1(1137.8,2417.32) 1629.92,2417.32 1702.76,2490.16 U3B.16@1702.76,2545.28
  Bottom Layer - Digital w10: v1(1137.05,2584.33) 1137.42,2583.96 1137.42,2417.7 v1(1137.8,2417.32)
RADIOB.SPI_MISOB: U1B.33 U3D.16
RADIOB.SPI_MOSIA: U1A.19 U3B.17 | length 1151.9
  Top Layer - RF w6: v1(907.26,2587.76) 907.26,2590.4 917.32,2600.47 U1A.19@917.32,2639.76
  Top Layer - RF w10: v1(906.61,2400.47) 910.68,2400.47 1632.85,2400.45 1722.44,2490.04 U3B.17@1722.44,2545.28
  Bottom Layer - Digital w10: v1(906.61,2400.47) 906.93,2400.8 906.93,2587.44 v1(907.26,2587.76)
RADIOB.SPI_MOSIB: U1B.19 U3D.17 | length 0.1
  Top Layer - RF w8: U3D.17@6933.07,3736.22 U3D.17@6933.12,3736.18
RADIOB.SPI_SCKA: U1A.21 U3B.18 | length 1180.9
  Top Layer - RF w6: v1(927.39,2587.76) 944.88,2605.25 U1A.21@944.88,2639.76
  Top Layer - RF w8: v1(926.29,2382.99) 1634.95,2382.99 1742.13,2490.16 U3B.18@1742.13,2545.28 U3B.18@1741.4,2544.55
  Bottom Layer - Digital w8: v1(926.29,2382.99) 926.29,2586.67 v1(927.39,2587.76)
RADIOB.SPI_SCKB: U1B.21 U3D.18 | length 1
  Top Layer - RF w8: U3D.18@6952.03,3735.49 U3D.18@6952.76,3736.22
RADIOB_NRESETA: U1A.26 U3B.15 | length 979.1
  Top Layer - RF w6: 1013.78,2595.16 U1A.26@1013.78,2639.76
  Top Layer - RF w10: 1013.78,2595.16 992.13,2573.5 992.13,2435.88 1624.86,2435.88 1683.07,2494.09 U3B.15@1683.07,2545.28
RADIOB_NRESETB: U1B.26 U3D.15
RFIA_N: C22A.1 L4A.1 U3A.23
RFIA_P: C24A.1 L4A.2 U3A.22
RFIB_N: C22B.1 L4B.1 U3B.23
RFIB_P: C24B.1 L4B.2 U3B.22
RFIC_N: C22C.1 L4C.1 U3C.23
RFIC_P: C24C.1 L4C.2 U3C.22
RFID_N: C22D.1 L4D.1 U3D.23
RFID_P: C24D.1 L4D.2 U3D.22
RFO_RADIOAA: L1A.2 L2A.1 U3A.24
RFO_RADIOAB: L1B.2 L2B.1 U3C.24
RFOB: U3B.24
RFOD: U3D.24
RX_ONA: R6A.2 U1A.59 | length 527.9
  Top Layer - RF w6: v1(1020,2970) 1020,2950 1027.56,2942.44 U1A.59@1027.56,2911.42
  Top Layer - RF w10: R6A.2@923.23,3366.14 v1(974.41,3366.14)
  Bottom Layer - Digital w10: v1(974.41,3366.14) 1020,3320.55 v1(1020,2970)
RX_ONB: R6B.2 U1B.59
RXTX_SWA: C46A.1 R14A.1 U6A.6 | length 410.5
  Top Layer - RF w10: C46A.1@2700.79,2332.68 2667.32,2332.68 2667.32,2401.57 ; R14A.1@2708.66,2401.57 2667.32,2401.57 ; U6A.6@2805.12,2582.48 2805.12,2519.69 2736.22,2450.79 2687.01,2450.79 2667.32,2431.1 2667.32,2401.57
RXTX_SWB: C46B.1 R14B.1 U6B.6 | length 379.8
  Top Layer - RF w10: R14B.1@10001.97,3603.55 9960.63,3603.55 ; C46B.1@10003.94,3524.81 9960.63,3524.81 9960.63,3603.55 ; U6B.6@10019.69,3804.13 10019.69,3794.63 cw(c9986.08,3794.63) 10009.84,3770.87 ccw(c10033.6,3747.11) 10000,3747.11 10000,3723.71 cw(c9900,3723.71) 9970.71,3653 ccw(c9995.05,3628.66) 9960.63,3628.66 9960.63,3603.55
SPI_CSN_SX126X: CN1.6 U4A.19 U4B.19 | length 194.7
  Top Layer - RF w10: CN1.6@201.85,2564.06 v4(319.8,2564.06) ; U4A.19@1777.56,1982.95 v1(1815.94,1982.95) ; U4B.19@7549.21,2779.53 v1(7587.6,2779.53)
SWA: C58A.1 F4A.1 L14A.2 U11A.3 | length 93.5
  Top Layer - RF w10: C58A.1@600.39,1053.15 600.39,1052.17 U11A.3@692.91,1052.17
SWB: C58B.1 F4B.1 L14B.2 U11B.3 | length 93.5
  Top Layer - RF w10: C58B.1@8515.75,1358.27 8515.75,1357.28 U11B.3@8608.27,1357.28
SX126x_BUSYA: U4A.14 | length 86.6
  Top Layer - RF w10: v1(1673.23,1870.74) U4A.14@1673.23,1957.36
SX126x_BUSYB: U4B.14 | length 86.6
  Top Layer - RF w10: v1(7444.88,2667.32) U4B.14@7444.88,2753.94
SX126x_NRESETA: C48A.1 C48B.1 C51A.1 C51B.1 C55A.1 C55B.1 C56A.1 C56B.1 CN2.1 NT15A.1 NT15B.1 U4A.15 U4B.15 U9A.4 U9B.4 U10A.4 U10B.4 U11A.4 U11A.5 U11B.4 U11B.5 U12A.6 U12B.6 | length 712.6
  Top Layer - RF w6: C56B.1@10297.24,2372.05 U12B.6@10360.24,2372.05
  Top Layer - RF w10: C51A.1@527.56,2952.76 492.13,2952.76 492.13,3008.86 U10A.4@539.37,3008.86 ; C48A.1@1098.43,2332.68 1131.89,2332.68 1131.89,2312.99 NT15A.1@1159.68,2312.99 1181.1,2312.99 1187.99,2319.88 U9A.4@1208.66,2319.88 ; v1@1692.94,1870.78 U4A.15@1692.91,1957.36 ; v1(7464.63,2667.32) U4B.15@7464.6,2753.91 ; C51B.1@8496.06,2204.72 8549.21,2204.72 8549.21,2231.3 U10B.4@8576.77,2231.3 ; C48B.1@9039.37,1338.58 9082.68,1338.58 9082.68,1365.16 U9B.4@9110.24,1365.16
  other v1: 679.13,944.88 698.82,944.88 718.5,944.88 1692.98,1870.74
SX126x_RFIA_N: C28A.1 L6A.1 U4A.22
SX126x_RFIA_P: C30A.1 L6A.2 U4A.21
SX126x_RFIB_N: C28B.1 L6B.1 U4B.22
SX126x_RFIB_P: C30B.1 L6B.2 U4B.21
SX126x_RFOA: U4A.23
SX126x_RFOB: U4B.23
SX126x_VDDA: C29A.1 C32A.1 NT17A.1 U4A.1 U4A.10 U4A.11 | length 120
  Top Layer - RF w10: U4A.1@1751.97,2106.97 1751.97,2136.54 C32A.1@1780,2164.57
  Top Layer - RF w20: NT17A.1@1504.96,1988.19 1555.12,1988.19 C29A.1@1555.12,1988.85
SX126x_VDDB: C29B.1 C32B.1 NT17B.1 U4B.1 U4B.10 U4B.11 | length 120
  Top Layer - RF w10: U4B.1@7523.62,2903.54 7523.62,2933.11 C32B.1@7551.65,2961.15
  Top Layer - RF w20: NT17B.1@7276.61,2784.77 7326.77,2784.77 C29B.1@7326.77,2785.43
SX126x_VR_PAA: U4A.24
SX126x_VR_PAB: U4B.24
SX1262_DIO1A: U1A.54 U4A.13 | length 128.1
  Top Layer - RF w6: U1A.54@1096.46,2911.42 1096.46,2937.15 1106.3,2946.99 v1(1106.3,2948.82)
  Top Layer - RF w10: v1@1653.51,1870.78 U4A.13@1653.54,1957.36
  other v1: 1653.48,1870.74
SX1262_DIO1B: U1B.54 U4B.13 | length 86.6
  Top Layer - RF w10: v1(7425.13,2667.32) U4B.13@7425.2,2753.94
SX1262_DIO2A: U4A.12
SX1262_DIO2B: U4B.12
SX1262_DIO3A: U4A.6 | length 33.5
  Top Layer - RF w10: U4A.6@1653.54,2106.97 v1(1653.54,2140.43)
SX1262_DIO3B: U4B.6 | length 33.5
  Top Layer - RF w10: U4B.6@7425.2,2903.54 v1(7425.2,2937.01)
SX1302_CSDA: R7A.1 R13A.2 U1A.10 U12A.4 | length 128.6
  Top Layer - RF w8: R7A.1@755.91,2746.06 801.18,2746.06 816.93,2761.81 U1A.10@877.95,2761.81
SX1302_CSDB: R7B.1 R13B.2 U1B.10 U12B.4
SX1302_PA_ONA: R15A.2 U1A.12 | length 54.8
  Top Layer - RF w6: v1(822.77,2733.86) 822.97,2734.06 875.79,2734.06 U1A.12@876.97,2735.24
SX1302_PA_ONB: R15B.2 U1B.12
SX1302_RESETA: C5A.1 D1A.1 R3A.2 U1A.7 | length 521.9
  Top Layer - RF w6: 637.8,2791.34 641.73,2787.4 799.21,2787.4 814.96,2803.15 U1A.7@877.95,2803.15
  Top Layer - RF w10: R3A.2@588.58,2883.86 637.8,2883.86 637.8,2814.96 ; D1A.1@592.52,2814.96 637.8,2814.96 ; C5A.1@596.46,2746.06 637.8,2746.06 637.8,2791.34 637.8,2814.96
SX1302_RESETB: C5B.1 D1B.1 R3B.2 U1B.7
SX1302_RXTX_SWA: R14A.2 U1A.29 | length 66
  Top Layer - RF w6: v1(1039.31,2580.32) 1055.12,2596.13 U1A.29@1055.12,2639.76
SX1302_RXTX_SWB: R14B.2 U1B.29
SYS_RFIA: C20A.2 C22A.2 C22B.2 U7A.1
SYS_RFIB: C20B.2 C22C.2 C22D.2 U7B.1
SYS_RFOA: C19A.1 L3A.2 U5A.1
SYS_RFOB: C19B.1 L3B.2 U5B.1
TCXO_32MA: R10A.1 R10B.1 R11A.1 U2A.3 | length 1710.9
  Top Layer - RF w10: U2A.3@1433.07,3389.76 1433.07,3435.04 v1(1496.06,3435.04) R10A.1@1645.67,3435.04 ; v1(1495.75,2289) 1651.44,2289 R11A.1@1652.44,2290 ; v1(1496.06,2883.86) R10B.1@1645.67,2883.86
  Bottom Layer - Digital w10: v1(1495.75,2289) 1496.06,2289 v1(1496.06,2883.86) v1(1496.06,3435.04)
TCXO_32MB: R10C.1 R10D.1 R11B.1 U2B.3 | length 252
  Top Layer - RF w10: v1(6775.59,4074.8) R10D.1@6856.3,4074.8 ; 7332.68,3090.55 R11B.1@7423.23,3090.55 ; v1(8242.13,3976.38) R10C.1@8322.83,3976.38
TX_ONA: R5A.2 U1A.63 | length 432.8
  Top Layer - RF w8: v1(972,2970) 972.44,2969.56 U1A.63@972.44,2911.42
  Top Layer - RF w10: R5A.2@925.2,3297.24 v1(972,3297.24)
  Bottom Layer - Digital w10: v1(972,2970) v1(972,3297.24)
TX_ONB: R5B.2 U1B.63
VCC12A: C2A.2 C3A.2 C4A.2 C7A.2 C10A.2 C11A.2 C54A.2 C59A.1 F4A.2 U1A.5 U1A.23 U1A.40 U1A.56 U10A.3 | length 881.5
  Top Layer - RF w6: 791.34,2830.71 U1A.5@877.95,2830.71 ; C2A.2@1027.56,3021.65 1054.88,3021.65 1068.94,3007.59 U1A.56@1068.94,2911.46
  Top Layer - RF w8: C54A.2@525.59,3090.55 492.13,3090.55 492.13,3034.45 U10A.3@539.37,3034.45 ; C10A.2@931.1,2470.47 972.44,2470.47 972.44,2539.37 ; C11A.2@931.1,2539.37 972.44,2539.37 ; U1A.23@972.44,2639.76 972.44,2539.37 ; U1A.40@1149.61,2734.25 1234.25,2734.25 1246.06,2746.06 C7A.2@1279.53,2746.06
  Top Layer - RF w10: C3A.2@763.78,2814.96 791.34,2814.96 791.34,2830.71 791.34,2850.39 791.34,2885.83 763.78,2885.83 C4A.2@763.78,2883.86
  other v1: 791.34,2848.2
VCC12B: C2B.2 C3B.2 C4B.2 C7B.2 C10B.2 C11B.2 C54B.2 C59B.1 F4B.2 U1B.5 U1B.23 U1B.40 U1B.56 U10B.3 | length 107.3
  Top Layer - RF w10: C54B.2@8496.06,2283.46 8549.21,2283.46 8549.21,2256.89 U10B.3@8576.77,2256.89
VCC_FEMA: C33A.1 C34A.1 C35A.1 C36A.1 C37A.1 C60A.1 F5A.2 L8A.1 L11A.1 U6A.15 | length 500.1
  Top Layer - RF w10: 2771.65,2923.23 2805.12,2923.23 U6A.15@2805.12,2690.74
  Top Layer - RF w20: L11A.1@2771.65,2777.67 C33A.1@2771.65,2834.65
  Top Layer - RF w30: C33A.1@2771.65,2834.65 C34A.1@2771.65,2893.7 2771.65,2923.23 C37A.1@2771.65,2952.76 C60A.1@2771.65,3011.81
VCC_FEMB: C33B.1 C34B.1 C35B.1 C36B.1 C37B.1 C60B.1 F5B.2 L8B.1 L11B.1 U6B.15 | length 797.4
  Top Layer - RF w10: 9986.22,4159.65 9996.91,4159.65 cw(c9996.91,4126.05) 10020.67,4149.81 cw(c10001.66,4130.8) 10028.54,4130.8 10028.54,3999.86 cw(c10015.1,3999.86) 10024.61,3990.36 10023.16,3988.92 ccw(c10031.57,3980.52) 10019.69,3980.52 U6B.15@10019.69,3912.4
  Top Layer - RF w20: L11B.1@9986.22,4050.4 C33B.1@9986.22,4125.2 9986.22,4159.65 C34B.1@9986.22,4194.1 C37B.1@9986.22,4263 C35B.1@10078.74,4263 ccw(c10083.49,4258.24) 10076.77,4258.24 C36B.1@10076.77,4133.07 L8B.1@10076.77,4050.4
VCCIO33A: C1A.2 C6A.2 C8A.2 C9A.2 C12A.2 C13A.2 C53A.2 F3A.2 R2A.2 R7A.2 U1A.14 U1A.30 U1A.47 U1A.61 | length 1378.3
  Top Layer - RF w8: C12A.2@1027.56,2470.47 1068.9,2470.47 1068.9,2539.37 ; C13A.2@1029.53,2541.34 C13A.2@1027.56,2539.37 1068.9,2539.37 ; U1A.30@1068.9,2639.76 1068.9,2539.37 ; U1A.47@1149.61,2830.71 1190.57,2830.71 1193.66,2833.8 1227.23,2833.8 1246.06,2814.96 C6A.2@1279.53,2814.96
  Top Layer - RF w10: R2A.2@588.58,2677.17 659.45,2677.17 659.45,2706.69 ; R7A.2@700.79,2746.06 659.45,2746.06 659.45,2706.69 ; F3A.2@750.11,3090.55 C53A.2@860.24,3090.55 895.67,3090.55 895.67,3021.65 C1A.2@931.1,3021.65 970.47,3021.65 1000,2992.13 U1A.61@1000,2911.42 ; C9A.2@763.78,2604.33 C9A.2@763.78,2608.27 799.21,2608.27 799.21,2677.17 ; C8A.2@763.78,2677.17 799.21,2677.17 ; U1A.14@877.95,2706.69 799.21,2706.69 ; 659.45,2706.69 799.21,2706.69 ; 799.21,2677.17 799.21,2706.69
VCCIO33B: C1B.2 C6B.2 C8B.2 C9B.2 C12B.2 C13B.2 C53B.2 F3B.2 R2B.2 R7B.2 U1B.14 U1B.30 U1B.47 U1B.61
VDD_RADIOA: C50A.1 F2A.2 NT13A.2 NT16A.2 NT16B.2 NT17A.2 | length 192.8
  Top Layer - RF w15: NT13A.2@1328.74,3090.55 1397.64,3090.55 v1(1397.64,3090)
  Top Layer - RF w25: v1(1397.64,1988.19) NT17A.2@1426.22,1988.19 ; v1(1397.64,2538.82) NT16B.2@1445,2538.82 ; v1(1397.64,3090) NT16A.2@1445,3090
  other v1: 1368.11,2155.51 1387.8,2155.51 1407.48,2155.51 1368.11,2234.25 1387.8,2234.25 1407.48,2234.25 1407.48,2253.94 1407.48,2273.62 1368.11,2293.31 1387.8,2293.31 1407.48,2293.31
VDD_RADIOB: C50B.1 F2B.2 NT13B.2 NT16C.2 NT16D.2 NT17B.2 | length 379.1
  Top Layer - RF w15: F2B.2@9281.61,1407.48 9381.89,1407.48
  Top Layer - RF w24: C50B.1@9295.28,1338.58 9381.89,1338.58 9381.89,1407.48
  Top Layer - RF w25: v1(6608.27,3729.76) NT16D.2@6655.63,3729.76 ; v1(7169.29,2784.77) NT17B.2@7197.87,2784.77 ; v1(8074.8,3631.34) NT16C.2@8122.17,3631.34
VDD_SX1250A: C23A.1 C26A.1 NT16A.1 U3A.2 U3A.9 U3A.10 | length 198.4
  Top Layer - RF w10: U3A.2@1722.44,3246.06 1722.79,3246.41 1722.79,3274.12 1739.68,3274.12 1739.68,3301.18 C23A.1@1771.65,3301.18
  Top Layer - RF w20: NT16A.1@1525,3101.18 1525,3159.45 C26A.1@1561.02,3159.45
VDD_SX1250B: C23B.1 C26B.1 NT16B.1 U3B.2 U3B.9 U3B.10 | length 198.4
  Top Layer - RF w10: U3B.2@1722.44,2694.88 1722.79,2695.23 1722.79,2722.94 1739.68,2722.94 1739.68,2750 C23B.1@1771.65,2750
  Top Layer - RF w20: NT16B.1@1525,2550 1525,2608.27 C26B.1@1561.02,2608.27
VDD_SX1250C: C23C.1 C26C.1 NT16C.1 U3C.2 U3C.9 U3C.10 | length 198.4
  Top Layer - RF w10: U3C.2@8399.61,3787.4 8399.95,3787.75 8399.95,3815.46 8416.84,3815.46 8416.84,3842.52 C23C.1@8448.82,3842.52
  Top Layer - RF w20: NT16C.1@8202.17,3642.52 8202.17,3700.79 C26C.1@8238.19,3700.79
VDD_SX1250D: C23D.1 C26D.1 NT16D.1 U3D.2 U3D.9 U3D.10 | length 198.4
  Top Layer - RF w10: U3D.2@6933.07,3885.83 6933.42,3886.17 6933.42,3913.88 6950.31,3913.88 6950.31,3940.95 C23D.1@6982.28,3940.95
  Top Layer - RF w20: NT16D.1@6735.63,3740.94 6735.63,3799.21 C26D.1@6771.65,3799.21
VR_PAA: C15A.1 C16A.1 L1A.1 U3A.1
VR_PAB: U3B.1
VR_PAC: C15B.1 C16B.1 L1B.1 U3C.1
VR_PAD: U3D.1
VREGA: C25A.1 L5A.1 U3A.6
VREGB: C25B.1 L5B.1 U3B.6
VREGC: C25C.1 L5C.1 U3C.6
VREGD: C25D.1 L5D.1 U3D.6
pads on no net: U3A.4 U3B.4 U3C.4 U3D.4 U4A.4 U4B.4 U6A.3 U6A.14 U6B.3 U6B.14 U12A.5 U12B.5
copper on no net:
  other v1: 1068.9,2504.92

## Polygon pours and split planes (outlines as drawn)
GND on Top Layer - RF "GND_L01_P020" (solid, pour order 20): 3740.16,39.37 39.37,39.37 39.37,3503.94 3740.16,3503.94
NetL14B_1 on Top Layer - RF "NETL14B_1_L01_P013" (solid, pour order 13): 8653.54,1348.43 8653.54,1525.59 8744.09,1525.59 8744.09,1348.43
SWB on Top Layer - RF "SWB_L01_P011" (solid, pour order 11): 8498.03,1348.43 8498.03,1525.59 8633.86,1525.59 8633.86,1410.43 8533.46,1410.43 8533.46,1348.43
SX126x_NRESETA on Top Layer - RF "SX126X_NRESETA_L01_P010" (solid, pour order 10): 8643.7,1289.37 8643.7,1161.42 8574.8,1161.42 8574.8,1289.37
GND on MidLayer3 - POWER "GND_L03_P028" (solid, pour order 28): 39.37,39.37 3740.16,39.37 3740.16,3503.94 39.37,3503.94
VDD_RADIOA on MidLayer3 - POWER "VDD_RADIOA_L03_P025" (solid, pour order 25): 1358.27,1948.82 1427.17,1948.82 1427.17,3120.08 1358.27,3120.08
GND on MidLayer2 - GND "GND_L02_P024" (solid, pour order 24): 39.37,3503.94 3740.16,3503.94 3740.16,39.37 39.37,39.37
GND on Bottom Layer - Digital "GND_L04_P027" (solid, pour order 27): 39.37,39.37 3740.16,39.37 3740.16,3503.94 39.37,3503.94

## Keep-outs
Top Layer - RF:
  lines w10: 371.63,196.06 cw(c200,200) 371.68,200 ; 371.63,3346.06 cw(c200,3350) 371.68,3350 ; 3746.83,346.06 cw(c3575.2,350) 3746.87,350 ; 3746.83,3246.06 cw(c3575.2,3250) 3746.87,3250
Bottom Layer - Digital:
  lines w10: 371.63,196.06 cw(c200,200) 371.68,200 ; 371.63,3346.06 cw(c200,3350) 371.68,3350 ; 3746.83,346.06 cw(c3575.2,350) 3746.87,350 ; 3746.83,3246.06 cw(c3575.2,3250) 3746.87,3250
Keep-Out Layer:
  lines w10: 78.74,78.74 3696.46,78.74 3696.46,3471.26 78.74,3471.26 78.74,118.11

## Other copper
Top Layer - RF:
  region net VDD_RADIOA: 1361.38,2303.37 1425.35,2303.37 1425.35,2224.41 1425.35,2145.45 1361.38,2145.45
  region net GND: 7379.52,2853.18 7379.52,2901.18 7348.49,2901.18 7348.49,2867.13 7358.24,2859.47 7366.58,2853.18
  region net NetL7B_2: 7407.48,2844.3 7407.48,2832.69 7372.05,2832.69 7344.49,2828.75 7301.18,2828.75 7301.18,2870.08 7338.7,2870.08 7367.51,2844.3
  region net SX126x_VDDB: 7407.44,2824.72 7407.44,2793.37 7387.53,2793.37 7344.22,2767.81 7320.87,2767.81 7320.87,2803.15 7350.11,2803.15 7388.63,2824.72
  region net NetC31B_1: 7401.41,2944.88 7320.87,2944.88 7320.87,2905.51 7385.9,2905.51 7385.9,2872.07 7401.41,2872.07
  region net VDD_SX1250B: 1622.05,2635.76 1622.05,2604.4 1568.2,2604.4 1581.51,2635.76
  region net GND: 1586.61,2716.54 1625.98,2716.54 1625.98,2663.44 1586.61,2663.44
  region net VREGB: 1648.62,2726.38 1568.9,2726.38 1568.9,2761.81 1572.83,2765.75 1648.62,2765.75
  region net GND: 1586.61,2716.54 1625.98,2716.54 1625.98,2663.44 1586.61,2663.44
  region net GND: 1607.86,2056.6 1607.86,2104.6 1576.83,2104.6 1576.83,2070.55 1586.59,2062.89 1594.92,2056.6
  region net GND: 1586.61,3267.72 1625.98,3267.72 1625.98,3214.62 1586.61,3214.62
  region net VDD_SX1250A: 1622.05,3186.94 1622.05,3155.58 1568.2,3155.58 1581.51,3186.94
  region net SX126x_VDDA: 1635.78,2028.14 1635.78,1996.79 1615.88,1996.79 1572.57,1971.23 1549.21,1971.23 1549.21,2006.57 1578.46,2006.57 1616.98,2028.14
  region net NetC31A_1: 1629.75,2148.3 1549.21,2148.3 1549.21,2108.93 1614.25,2108.93 1614.25,2075.49 1629.75,2075.49
  region net NetL7A_2: 1635.83,2047.73 1635.83,2036.11 1600.39,2036.11 1572.83,2032.17 1529.53,2032.17 1529.53,2073.5 1567.04,2073.5 1595.85,2047.73
  region net VREGD: 6860.24,3958.66 6726.38,3958.66 6726.38,3923.23 6840.55,3923.23 6848.68,3880.31 6860.24,3880.31
  region net VDD_SX1250D: 6832.68,3826.7 6832.68,3795.34 6778.83,3795.34 6792.14,3826.7
  region net GND: 6797.24,3907.48 6836.61,3907.48 6836.61,3854.38 6797.24,3854.38
  region net DCC_SWD: 6836.61,3834.51 6836.61,3846.25 6800.73,3846.25 6775.59,3860.24 6728.52,3860.24 6728.52,3834.74
  region net VREGC: 8326.77,3860.24 8192.91,3860.24 8192.91,3824.8 8307.09,3824.8 8315.21,3781.88 8326.77,3781.88
  region net VDD_SX1250C: 8299.21,3728.28 8299.21,3696.92 8245.37,3696.92 8258.67,3728.28
  region net GND: 8263.78,3809.06 8303.15,3809.06 8303.15,3755.96 8263.78,3755.96
  region net DCC_SWC: 8303.15,3736.09 8303.15,3747.82 8267.27,3747.82 8242.13,3761.81 8195.05,3761.81 8195.05,3736.31
  region net VREGB: 1649.61,2767.72 1515.75,2767.72 1515.75,2732.28 1629.92,2732.28 1638.05,2689.36 1649.61,2689.36
  region net DCC_SWB: 1625.98,2643.57 1625.98,2655.3 1590.1,2655.3 1564.96,2669.29 1517.89,2669.29 1517.89,2643.79
  region net VREGD: 6860.24,3958.66 6726.38,3958.66 6726.38,3923.23 6840.55,3923.23 6848.68,3880.31 6860.24,3880.31
  region net GND: 6797.24,3907.48 6836.61,3907.48 6836.61,3854.38 6797.24,3854.38
  region net DCC_SWD: 6836.61,3834.51 6836.61,3846.25 6800.73,3846.25 6775.59,3860.24 6728.52,3860.24 6728.52,3834.74
  region net VREGC: 8326.77,3860.24 8192.91,3860.24 8192.91,3824.8 8307.09,3824.8 8315.21,3781.88 8326.77,3781.88
  region net GND: 8263.78,3809.06 8303.15,3809.06 8303.15,3755.96 8263.78,3755.96
  region net DCC_SWC: 8303.15,3736.09 8303.15,3747.82 8267.27,3747.82 8242.13,3761.81 8195.05,3761.81 8195.05,3736.31
  region net VREGB: 1649.61,2767.72 1515.75,2767.72 1515.75,2732.28 1629.92,2732.28 1638.05,2689.36 1649.61,2689.36
  region net DCC_SWB: 1625.98,2643.57 1625.98,2655.3 1590.1,2655.3 1564.96,2669.29 1517.89,2669.29 1517.89,2643.79
  region net DCC_SWA: 1625.98,3194.75 1625.98,3206.48 1590.1,3206.48 1564.96,3220.47 1517.89,3220.47 1517.89,3194.98
  region net VREGA: 1649.61,3318.9 1515.75,3318.9 1515.75,3283.46 1629.92,3283.46 1638.05,3240.55 1649.61,3240.55

## Silkscreen, mask and mechanical layers (free items; w line width, h text height)
Bottom Overlay:
  drawing of 55 lines, arcs and shapes, not listed
Board Shape:
  the board outline again, w10